# EAGLE board Tugas BRD (EAGLE 7.6.0)
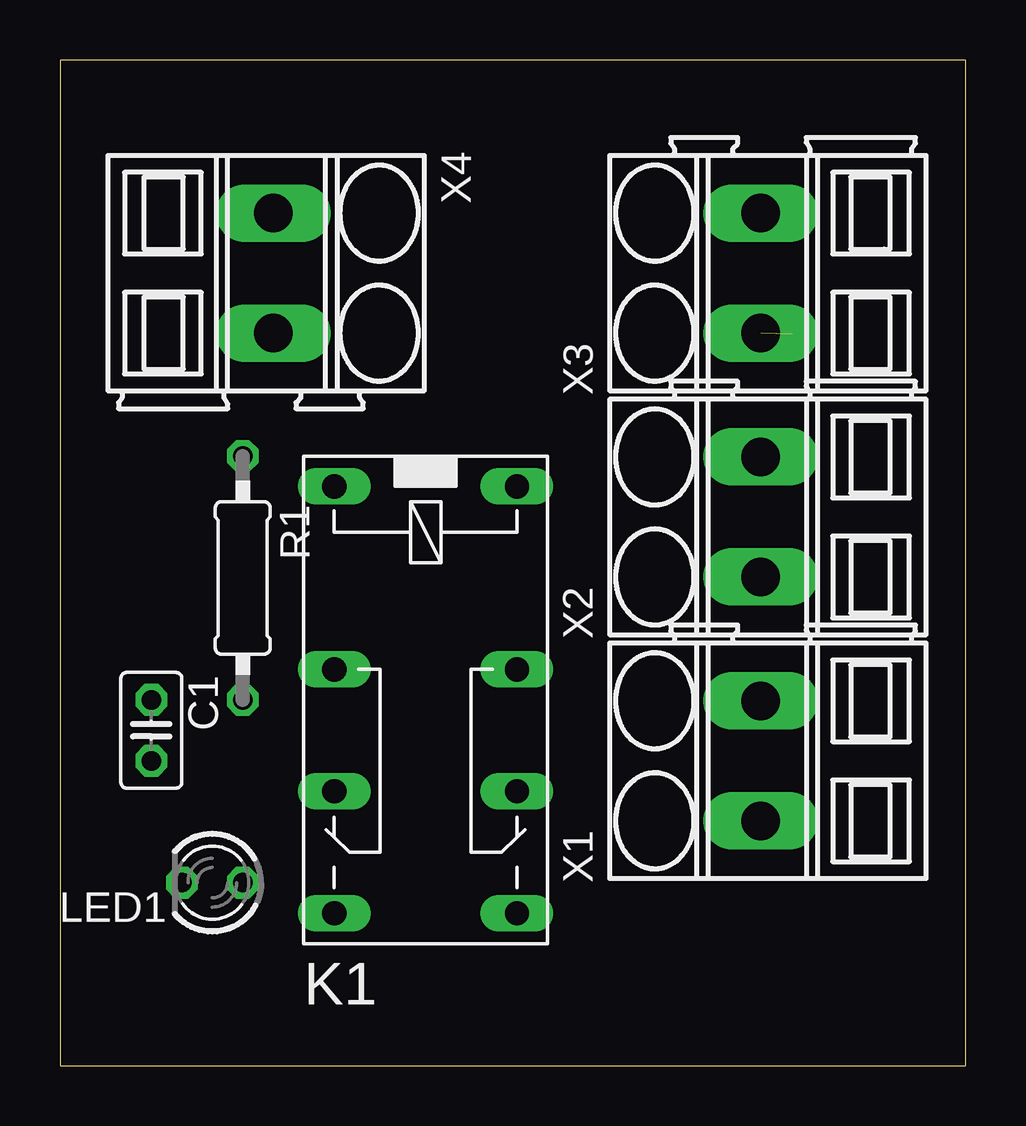
[diagram p0: board, top side]
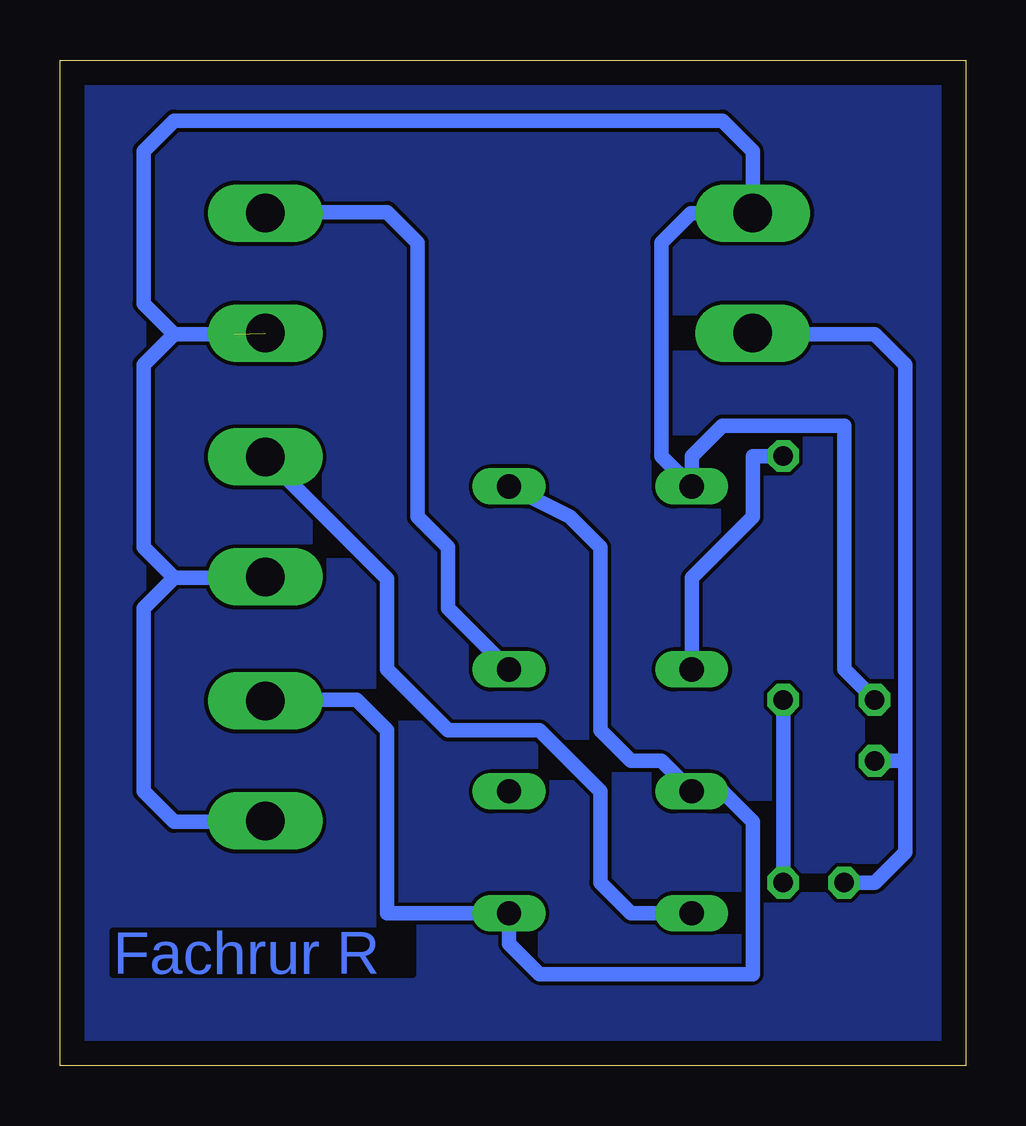
[diagram p1: board, bottom side, seen from below]

Size 37.77 x 41.9 mm. Coordinates in mm from the lower left corner, seen from the top.
Outline: 0,0 37.77,0 37.77,41.9 0,41.9 0,0
Copper layers (1*16): Top 0.035mm / dielectric 1.5mm / Bottom 0.035mm
Design rules "default": minimum track width 6mil, minimum drill 0.35mm, track to track 6mil, track to pad 6mil, pad to pad 6mil, via to via 6mil, smd to smd 6mil, copper to edge 40mil, drill to drill 6mil, minimum pad ring 10mil, minimum via ring 8mil, stop-mask expansion 4mil, vias tented up to drill 0mil, thermal gap 10mil

## Footprints (pad centres in the part's own frame; a part is rotated, then mirrored left to right if it is on the bottom)
C025-025X050 = drill 0.813 octagon: 1 -1.27,0; 2 1.27,0
351 = drill 1.016 long: 1 -3.81,-3.81; 16 -3.81,3.81; O1 8.89,-3.81; O2 8.89,3.81; P1 3.81,-3.81; P2 3.81,3.81; S1 13.97,-3.81; S2 13.97,3.81
LED3MM = drill 0.813 octagon: A -1.27,0; K 1.27,0
0207/10 = drill 0.813 octagon: 1 -5.08,0; 2 5.08,0
SMKDSP_1,5/2 = drill 1.6 pad 1.8 long: 1 -2.5,0; 2 2.5,0

## Placement (x,y rotation side)
C1  [C025-025X050]  3.81,13.97 270 top
K1  351  [351]  15.24,20.32 270 top
LED1  [LED3MM]  6.35,7.62 180 top
R1  [0207/10]  7.62,20.32 270 top
X1  SMKDSP_1,5/2  [SMKDSP_1,5/2]  29.21,12.7 90 top
X2  SMKDSP_1,5/2  [SMKDSP_1,5/2]  29.21,22.86 90 top
X3  SMKDSP_1,5/2  [SMKDSP_1,5/2]  29.21,33.02 90 top
X4  SMKDSP_1,5/2  [SMKDSP_1,5/2]  8.89,33.02 270 top

## Library data of the parts
C1 = rcl; SPICEPREFIX: C
K1 = relay; OC_FARNELL: unknown; OC_NEWARK: unknown
LED1 = led
R1 = rcl; SPICEPREFIX: R
X1-X4 = con-phoenix-smkdsp; MF: FARNELL; MPN: 1733570; OC_FARNELL: 3041244; OC_NEWARK: 69C8588

## Nets
GND: C1.1 K1.1 X1.1 X2.1 X3.1 X4.1
N$1: K1.P1 R1.1
N$2: LED1.A R1.2
O1: K1.S1 X2.2
P2: K1.P2 X3.2
S12: K1.16 K1.O1 K1.S2 X1.2
VOUT: C1.2 LED1.K X4.2

## Tracks (layer width: path | path; a pad name or v marks a point on that pad's centre or on a via)
G_
  pour Bottom: 0,41.91 0,0 38.1,0 38.1,41.91
GND  (1 unrouted)
  Bottom 0.61: 33.02,20.32 34.29,19.05 34.29,11.43 33.02,10.16 30.52,10.16 X1.1 | 33.02,20.32 34.29,21.59 34.29,29.21 33.02,30.48 | 33.02,30.48 34.29,31.75 34.29,38.1 33.02,39.37 10.16,39.37 8.89,38.1 X4.1 | 30.52,30.48 33.02,30.48 | X2.1 30.52,20.32 33.02,20.32 | X4.1 8.89,35.56 | X4.1 11.47,35.52 12.7,34.29 12.7,25.4 K1.1 11.43,25.4 10.16,26.67 5.08,26.67 5.08,16.51 C1.1
N$1
  Bottom 0.61: K1.P1 11.43,20.32 8.89,22.86 8.89,25.4 R1.1
N$2
  Bottom 0.61: LED1.A R1.2
O1
  Bottom 0.61: X2.2 24.13,20.28 24.13,16.51 21.59,13.97 17.78,13.97 15.24,11.43 15.24,7.62 13.97,6.35 K1.S1
P2
  Bottom 0.61: X3.2 arc90 29.17,35.56 24.13,35.56 22.86,34.29 22.86,22.86 21.59,21.59 21.59,19.05 K1.P2
S12
  Bottom 0.61: K1.16 16.51,22.86 15.24,21.59 15.24,13.97 13.97,12.7 12.7,12.7 K1.O1 10.16,11.43 8.89,10.16 8.89,3.81 17.78,3.81 19.05,5.08 K1.S2 24.13,6.35 24.13,13.97 25.4,15.24 27.94,15.24 27.98,15.2 X1.2
VOUT
  Bottom 0.61: LED1.K 3.81,7.62 2.54,8.89 2.54,12.7 | C1.2 2.54,12.7 | 2.54,12.7 2.54,29.21 3.81,30.48 8.85,30.48 X4.2

## Text on the board
Bottom: Fachrur R